# Altium PCB Programmer.PcbDoc
Units mil, origin at the board's own origin, x right, y up, seen from the top; angles counter-clockwise.
Board outline 700 x 890 mil, 2 copper layers (Top Layer, Bottom Layer); 3 components, 8 nets, 27 pads, 0 vias.
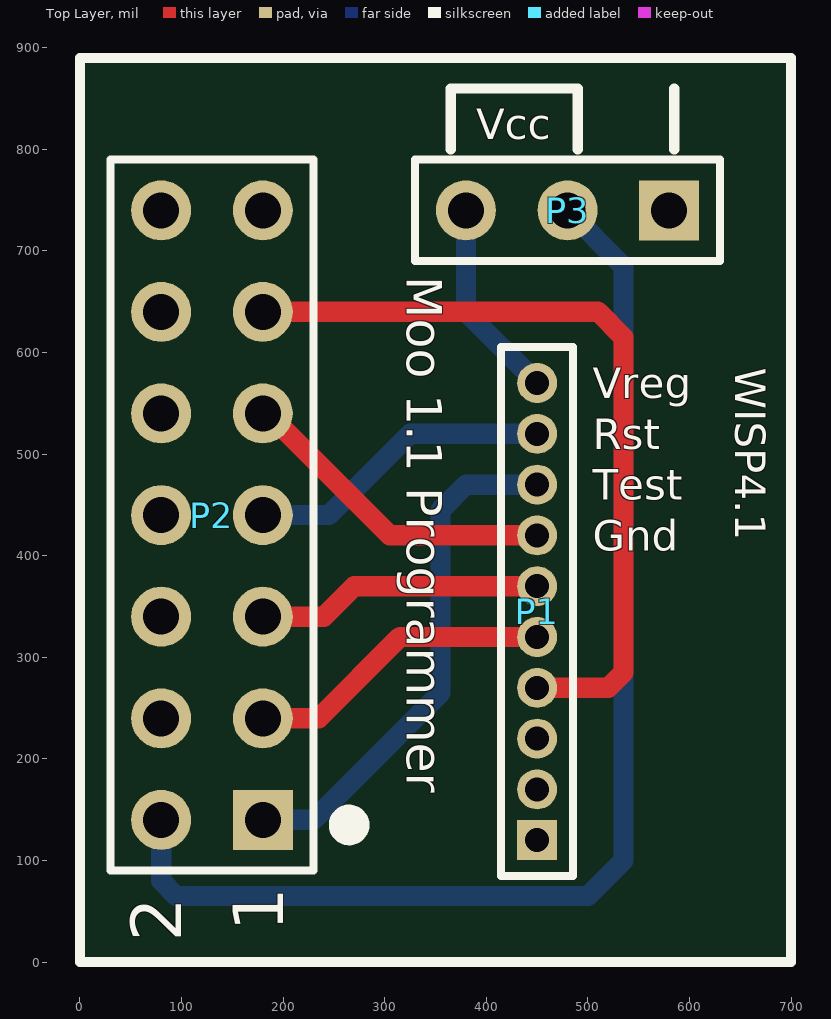
[diagram p0: Top Layer view]
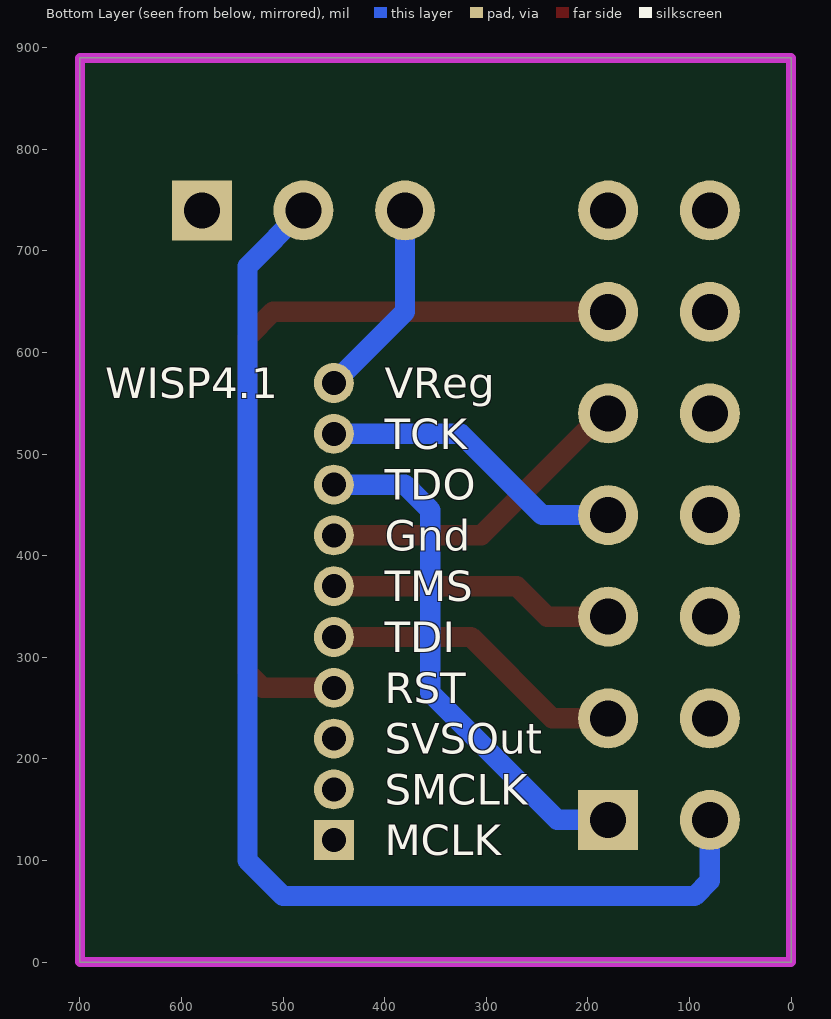
[diagram p1: Bottom Layer view, seen from below]

## Layer stack, top to bottom
Top Layer: signal copper 1.4
Dielectric: dielectric 12.6, FR-4, Dk 4.8
Bottom Layer: signal copper 1.4

## Board outline
0,0 700,0 700,890 0,890

## Design rules (kind name [scope] priority, off if disabled: settings)
Clearance [All] p1: gap=10
MinimumSolderMaskSliver [All] p1: minsoldermaskwidth=2
PolygonConnect [All] p1: connectstyle=Relief reliefconductorwidth=10 reliefentries=4 polygonreliefangle="90 Angle"
RoomDefinition Programmer [InComponentClass('Programmer')] p1: confinementstyle=ConfineIn formatcopy=TRUE lockcomponents=FALSE outline -45,-90 830,-90 830,995 -45,995
RoutingVias [All] p1: holewidth=28 width=50 viastyle="Through Hole" minholewidth=28 minwidth=50 maxholewidth=28 maxwidth=50
SilkscreenOverComponentPads [All] p1: minsilkscreentomaskgap=10
SolderMaskExpansion [All] p1: expansion=4
TestPointUsage [All] p1: valid=0 allowmultiple=FALSE
Testpoint [All] p1: side=15 testpointundercomponent=TRUE minsize=40 maxsize=100 preferedsize=60 minholesize=0 maxholesize=40 preferedholesize=32 testpointgrid=1 style=1023 order=0-112345678
Width [All] p1: maxlimit=78 minlimit=10 preferedwidth=10 minimp=50.000000 maximp=50.000000 favimp=50.000000
22 further rules are at their usual default settings.

## Components (designator, comment, footprint, x,y, rotation, side; value= is the part's Value field where it differs from the comment)
P1 "MHDR1X10" MHDR1X10 450,120 r90 top
P2 "Header 7X2" HDR2X7 180,140 r90 top
P3 "Header 3" HDR1X3 580,740 r180 top

## Footprints (in the part's own frame and the unit in brackets; to place one, negate y for a bottom-side part, rotate by r counter-clockwise, add the part's x,y. Pads: shape width x height; smd on the part's side, far side on the other; paste and mask are expansions set on the pad)
HDR1X3 [mm] "Connector; Header; 3 Position"
  rect 1.5x1.5 hole 0.9: 1(0,0)
  round 1.5 hole 0.9: 2(2.54,0) 3(5.08,0)
  silkscreen extent -1.27,-1.27 6.35,1.27
HDR2X7 [mm] "Connector; Header; 7x2 Position"
  rect 1.5x1.5 hole 0.9: 1(0,0)
  round 1.5 hole 0.9: 2(0,2.54) 3(2.54,0) 4(2.54,2.54) 5(5.08,0) 6(5.08,2.54) 7(7.62,0) 8(7.62,2.54) 9(10.16,0) 10(10.16,2.54) 11(12.7,0) 12(12.7,2.54) 13(15.24,0) 14(15.24,2.54)
  silkscreen extent -1.27,-1.27 16.51,3.81
MHDR1X10 [mm] "Connector; Header; 10 Position"
  rect 1x1 hole 0.6: 1(0,0)
  round 1 hole 0.6: 2(1.27,0) 3(2.54,0) 4(3.81,0) 5(5.08,0) 6(6.35,0) 7(7.62,0) 8(8.89,0) 9(10.16,0) 10(11.43,0)
  silkscreen extent -0.9,-0.9 12.33,0.9

## Part data
P1: "Header, 10-Pin"
P2: "Header, 7-Pin, Dual row"
P3: library part MHDR1X2

## Nets (pads, with @x,y where several pads share a name; then routed paths per layer and width w, separated by ;. In a path a pad name is that pad's centre, name@x,y a point inside that pad or via, vN(x,y) a via of type N, cw(c..) or ccw(c..) an arc to the next point about the centre after c; other vN are vias at no path point)
GND: P1.7 P2.9 | length 332
  Top Layer w20: P2.9 185,540 305,420 P1.7 P1.7@443.88,420
  Bottom Layer w20: P2.9@180,533.88 P2.9
NetP2_2: P2.2 P3.2 | length 1198.5
  Bottom Layer w20: P2.2 80,80 95,65 500,65 535,100 535,685 P3.2
RST: P1.4 P2.11 | length 786.6
  Top Layer w20: P2.11 510,640 535,615 535,285 520,270 P1.4
TCK: P1.9 P2.7 | length 303.1
  Bottom Layer w20: P2.7 245,440 325,520 P1.9
TDI: P1.5 P2.3 | length 303.1
  Top Layer w20: P2.3 235,240 315,320 P1.5
TDO: P1.8 P2.1 | length 512.1
  Bottom Layer w20: P2.1 230,140 355,265 355,445 380,470 P1.8
TMS: P1.6 P2.5 | length 282.4
  Top Layer w20: P2.5 240,340 270,370 P1.6
VCC: P1.10 P3.3 | length 199
  Bottom Layer w20: P3.3 380,640 P1.10
pads on no net: P1.1 P1.2 P1.3 P2.4 P2.6 P2.8 P2.10 P2.12 P2.13 P2.14 P3.1

## Keep-outs
Keep-Out Layer:
  the board outline again, w10

## Silkscreen, mask and mechanical layers (free items; w line width, h text height)
Top Overlay:
  circle w20: c265,135 r10
  lines w10: 365,800 365,860 490,860 490,800 ; 585,800 585,860 ; 0,0 700,0 700,890 0,890 0,0
  text "Vcc" at 390,810 h30
  text "Moo 1.1 Programmer" at 310,675 h60 r270
  text "WISP4.1" at 645,585 h30 r270
  text "Vreg" at 505,555 h30
  text "Rst" at 505,505 h30
  text "Test" at 505,455 h30
  text "Gnd" at 505,405 h30
Bottom Overlay:
  text "VReg" at 400,555 h30
  text "WISP4.1" at 675,555 h30
  text "TCK" at 400,505 h30
  text "TDO" at 400,455 h30
  text "Gnd" at 400,405 h30
  text "TMS" at 400,355 h30
  text "TDI" at 400,305 h30
  text "RST" at 400,255 h30
  text "SVSOut" at 400,205 h30
  text "SMCLK" at 400,155 h30
  text "MCLK" at 400,105 h30

## Text inside footprints (layer, text, board x,y; h text height)
P2: Top Overlay "2" at 100,20 h50 r90; Top Overlay "1" at 200,30 h50 r90